# EAGLE board PCB2_SHIELD (EAGLE 9.2.0)
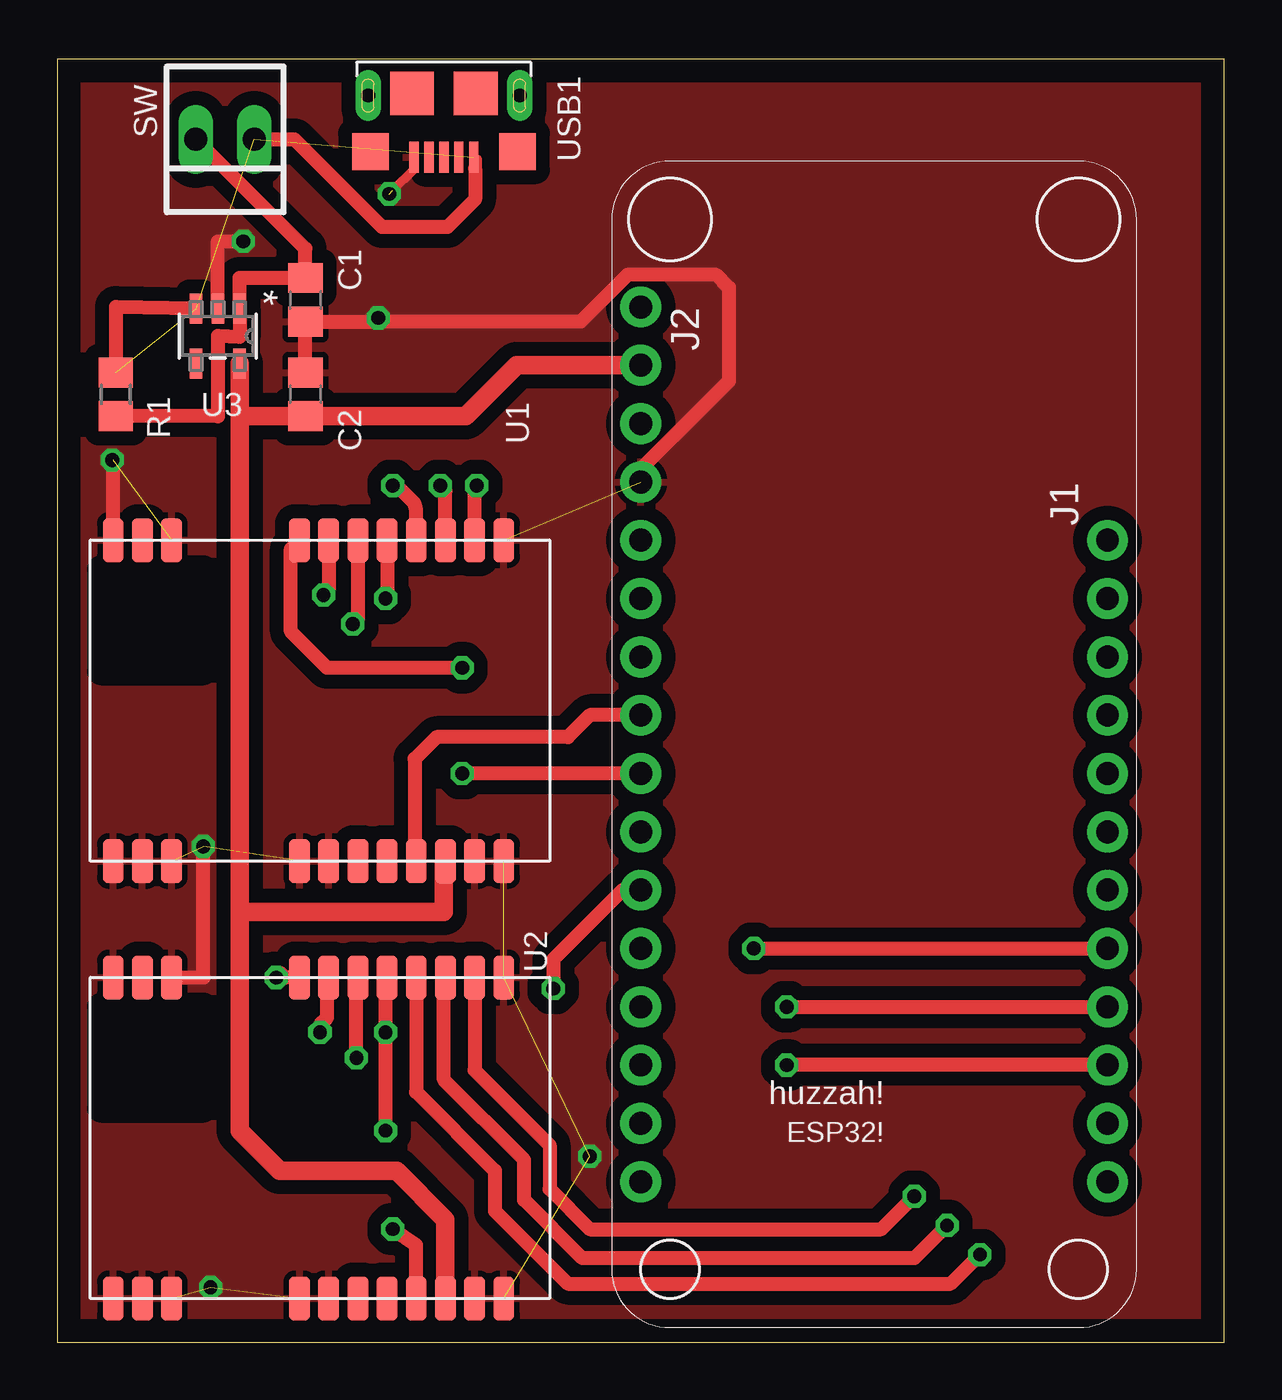
[diagram p0: board, top side]
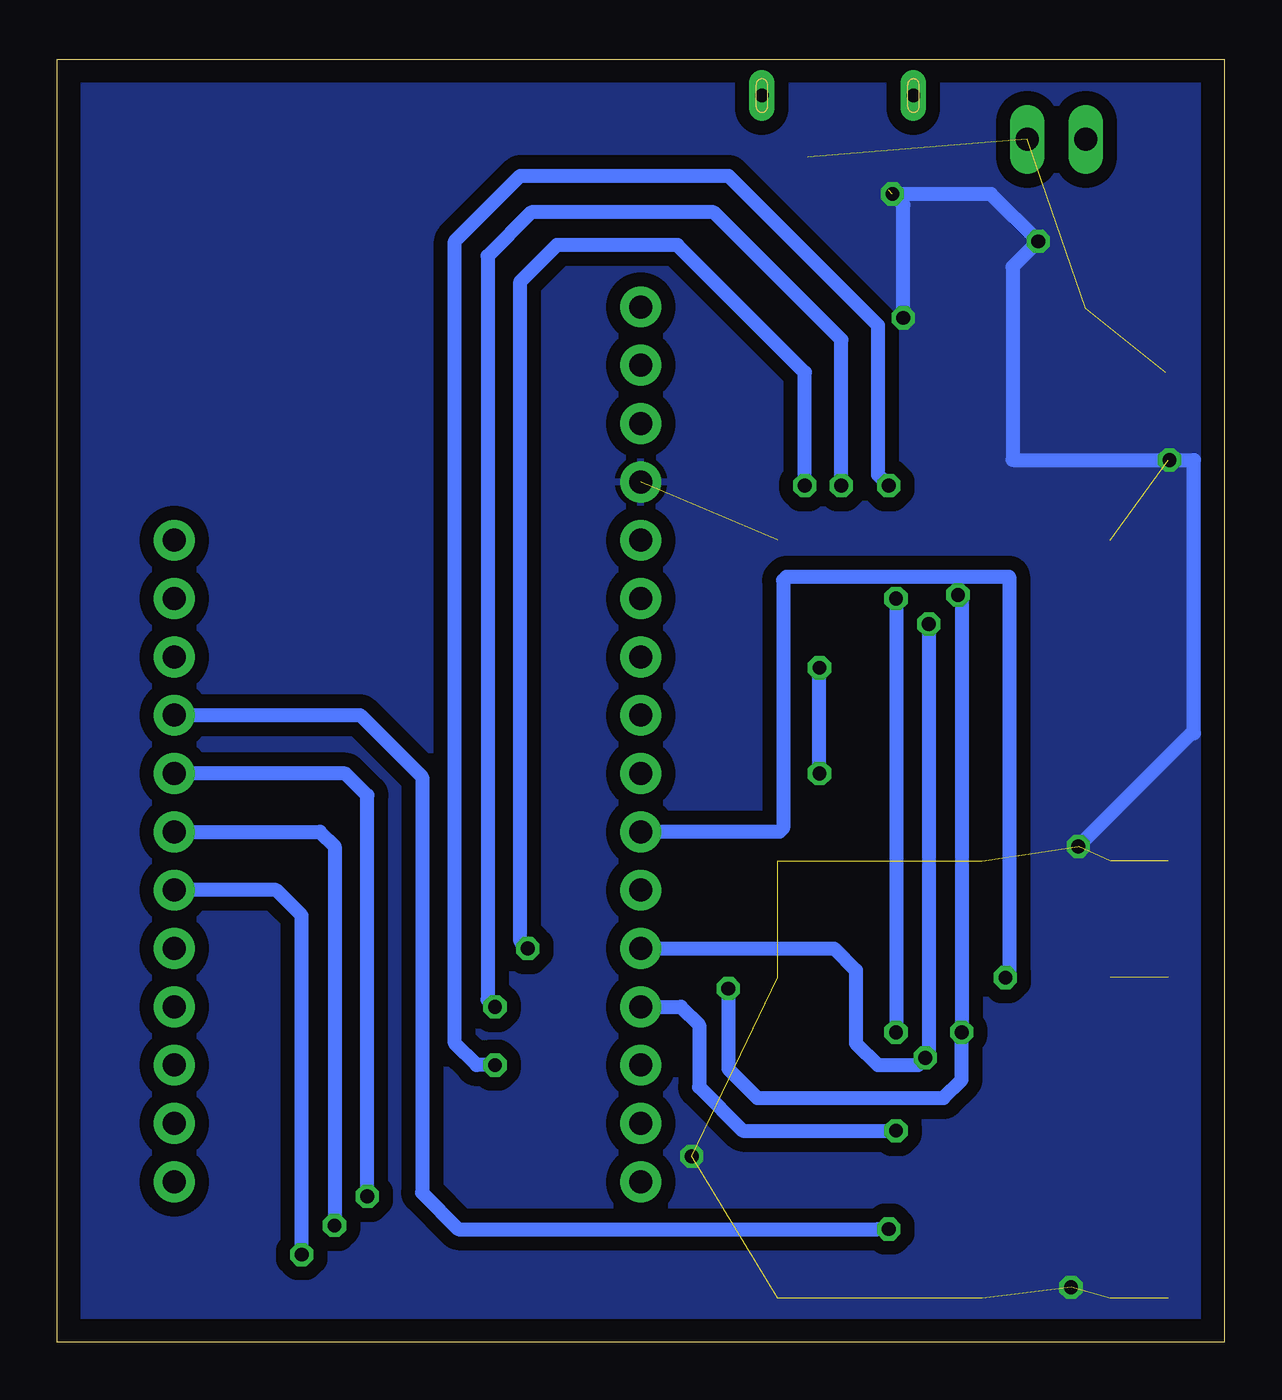
[diagram p1: board, bottom side, seen from below]

Size 50.8 x 55.88 mm. Coordinates in mm from the lower left corner, seen from the top.
Outline: 0,0 50.8,0 50.8,55.88 0,55.88 0,0
Copper layers (1*16): Top 0.035mm / dielectric 1.5mm / Bottom 0.035mm
Design rules "default": minimum track width 10mil, minimum drill 24mil, track to track 8mil, track to pad 8mil, pad to pad 8mil, via to via 8mil, smd to smd 8mil, copper to edge 40mil, drill to drill 8mil, minimum pad ring 10mil, minimum via ring 8mil, stop-mask expansion 4mil, vias tented up to drill 0mil, thermal gap 10mil
Net classes: 0 default: width 0.406 mm, drill 0.584 mm, clearance 0.203 mm

## Footprints (pad centres in the part's own frame; a part is rotated, then mirrored left to right if it is on the bottom)
C0805 = smd 1.3 x 1.5: 1 -0.95,0; 2 0.95,0
FEATHERWING = drill 1 pad 1.778: 1 6.35,1.27; 2 8.89,1.27; 3 11.43,1.27; 4 13.97,1.27; 5 16.51,1.27; 6 19.05,1.27; 7 21.59,1.27; 8 24.13,1.27; 9 26.67,1.27; 10 29.21,1.27; 11 31.75,1.27; 12 34.29,1.27; 13 36.83,1.27; 14 39.37,1.27; 15 41.91,1.27; 16 44.45,1.27; 17 44.45,21.59; 18 41.91,21.59; 19 39.37,21.59; 20 36.83,21.59; 21 34.29,21.59; 22 31.75,21.59; 23 29.21,21.59; 24 26.67,21.59; 25 24.13,21.59; 26 21.59,21.59; 27 19.05,21.59; 28 16.51,21.59
R0805 = smd 1.3 x 1.5: 1 -0.95,0; 2 0.95,0
22-23-2021 = drill 1 long: 1 -1.27,0; 2 1.27,0
E22 = smd 1.905 x 0.9: 1 6.985,-9; 2 6.985,-7.73; 3 6.985,-6.46; 4 6.985,-0.89; 5 6.985,0.38; 6 6.985,1.65; 7 6.985,2.92; 8 6.985,4.19; 9 6.985,5.46; 10 6.985,6.73; 11 6.985,8; 12 -6.985,8; 13 -6.985,6.73; 14 -6.985,5.46; 15 -6.985,4.19; 16 -6.985,2.92; 17 -6.985,1.65; 18 -6.985,0.38; 19 -6.985,-0.89; 20 -6.985,-6.46; 21 -6.985,-7.73; 22 -6.985,-9
SOT25 = smd 1.311 x 0.551: 1 -1.2,0.95; 2 -1.2,0; 3 -1.2,-0.95; 4 1.2,-0.95; 5 1.2,0.95
10118193-0001LF = drill 0.6 pad 1.016 long: 1 -3.3,0; 2 3.3,0 | smd 1.9 x 1.9: BASE@1 -1.385,-0.095; BASE@2 1.385,-0.095 | smd 1.6 x 1.6: BASE@3 -3.2,2.445; BASE@4 3.2,2.445 | smd 0.4 x 1.35: D+ 0,2.68; D- -0.65,2.68; GND 1.3,2.68; ID 0.65,2.68; VBUS -1.3,2.68

## Placement (x,y rotation side)
C1  [C0805]  10.79,45.4 270 top
C2  [C0805]  10.79,41.27 90 top
MS1  FEATHERWING  [FEATHERWING]  24.13,51.44 270 top
R1  [R0805]  2.54,41.27 90 top
SW  22-23-2021  [22-23-2021]  7.3,52.39 180 top
U1  E22-900M22S  [E22]  11.43,27.94 270 top
U2  E22-400M22S  [E22]  11.43,8.89 270 top
U3  AP2112  [SOT25]  6.99,43.81 270 top
USB1  USB  [10118193-0001LF]  16.83,54.29 180 top

## Library data of the parts
C1 C2 R1 = rcl
MS1 = adafruit
SW = con-molex; MF: MOLEX; MPN: 22-23-2021; OC_FARNELL: 1462926; OC_NEWARK: 25C3832
U1 U2 = ebyte
U3 = diodes-inc
USB1 = con-amphenol

## Nets
GND: C1.2 C2.2 MS1.4 U1.1 U1.2 U1.3 U1.4 U1.5 U1.10 U1.11 U1.12 U1.20 U1.22 U2.1 U2.2 U2.3 U2.4 U2.5 U2.10 U2.11 U2.12 U2.20 U2.22 U3.2 USB1.GND
N$1: MS1.9 U1.19
N$2: MS1.11 U1.18 U2.18
N$3: MS1.12 U1.17 U2.17
N$4: MS1.13 U1.16 U2.16
N$5: MS1.19 U1.15
N$6: MS1.20 U1.14
N$7: MS1.21 U1.13
N$8: MS1.8 U1.8
N$9: MS1.25 U2.8
N$10: MS1.24 U2.13
N$11: MS1.23 U2.14
N$12: MS1.22 U2.15
N$14: MS1.10 U2.19
N$15: C1.1 R1.1 SW.2 U3.1
N$17: R1.2 SW.1 U3.3 USB1.VBUS
VCC: C2.1 MS1.2 U1.9 U2.9 U3.5

## Tracks (layer width: path | path; a pad name or v marks a point on that pad's centre or on a via)
GND  (via drill 0.6)  (21 unrouted)
  Top 0.406: USB1.GND 15.53,51.09 14.61,50.16
  Top 0.61: 13.81,44.45 C1.2 C2.2 | 13.81,44.45 v13.97,44.61 | U3.2 6.99,47.94 v8.1,47.94 | U1.22 2.43,38.42 v2.38,38.42 | U2.20 6.35,15.88 v6.35,21.59 | MS1.4 25.4,38.03 29.23,41.86 29.23,45.93 28.68,46.48 24.82,46.48 22.79,44.45 13.81,44.45
  Bottom 0.61: v13.97,44.61 13.97,49.53 v14.45,50.01 10.16,50.01 v8.1,47.94 9.21,46.83 9.21,38.42 v2.38,38.42 1.32,38.42 1.32,26.51 1.43,26.51 v6.35,21.59
  other vias: 6.67,2.38 23.18,8.1
  pour Bottom (isolate 0.61, rank 5): -1.27,57.47 53.02,57.47 53.02,-1.75 -1.27,-1.75
  pour Top (isolate 0.61, rank 5): -4.76,59.69 56.99,59.69 56.99,-4.13 -4.76,-4.13
N$1  (via drill 0.6)
  Top 0.61: MS1.9 v17.62,24.77 | v17.62,29.37 11.75,29.37 10.16,30.96 10.16,34.55 U1.19
  Bottom 0.61: v17.62,24.77 v17.62,29.37
N$2  (via drill 0.6)
  Top 0.61: U1.18 11.81,32.77 v11.59,32.54 | v11.43,13.49 11.43,13.81 11.75,14.13 11.75,15.81 U2.18 | MS1.11 24.61,19.68 21.59,16.67 v21.59,15.4
  Bottom 0.61: v11.59,32.54 11.43,32.38 v11.43,13.49 11.43,11.43 12.22,10.64 20.32,10.64 21.59,11.91 v21.59,15.4
N$3  (via drill 0.6)
  Top 0.61: U1.17 13.08,31.5 v12.86,31.27 | v13.02,12.38 13.02,15.81 U2.17
  Bottom 0.61: v12.86,31.27 12.86,12.54 v13.02,12.38 13.34,12.06 15.08,12.06 16.03,13.02 16.03,16.19 16.99,17.14 MS1.12
N$4  (via drill 0.6)
  Top 0.61: U1.16 14.35,32.45 v14.29,32.38 | U2.16 14.29,15.81 v14.29,13.49 v14.29,9.21
  Bottom 0.61: v14.29,32.38 v14.29,13.49 | MS1.13 23.65,14.61 22.86,13.81 22.86,11.11 20.95,9.21 v14.29,9.21
N$5  (via drill 0.6)
  Top 0.61: MS1.19 v31.75,12.06 | v14.61,37.31 14.76,37.31 15.56,36.51 15.62,36.26 U1.15
  Bottom 0.61: v31.75,12.06 32.54,12.06 33.5,13.02 33.5,47.94 30.64,50.8 21.59,50.8 15.08,44.29 15.08,37.78 v14.61,37.31
N$6  (via drill 0.6)
  Top 0.61: U1.14 16.89,37.09 v16.67,37.31 | v31.75,14.61 MS1.20
  Bottom 0.61: v16.67,37.31 16.67,43.66 22.23,49.21 30.16,49.21 32.07,47.31 32.07,14.92 v31.75,14.61
N$7  (via drill 0.6)
  Top 0.61: U1.13 18.16,37.21 v18.26,37.31 | v30.32,17.14 MS1.21
  Bottom 0.61: v18.26,37.31 18.26,42.23 23.81,47.78 29.05,47.78 30.64,46.2 30.64,17.46 v30.32,17.14
N$8
  Top 0.61: MS1.8 23.18,27.3 22.23,26.35 16.51,26.35 15.56,25.4 15.56,21.02 U1.8
N$9  (via drill 0.6)
  Top 0.61: U2.8 15.62,4.22 v14.61,4.92
  Bottom 0.61: MS1.25 37.62,27.3 34.92,24.61 34.92,6.51 33.34,4.92 15.08,4.92 v14.61,4.92
N$10  (via drill 0.6)
  Top 0.61: U2.13 18.16,11.84 21.43,8.57 21.43,6.67 23.18,4.92 35.88,4.92 v37.31,6.35
  Bottom 0.61: v37.31,6.35 37.31,23.81 38.26,24.77 MS1.24
N$11  (via drill 0.6)
  Top 0.61: v38.73,5.08 37.31,3.65 22.86,3.65 20.32,6.19 20.32,7.94 16.83,11.43 16.83,15.81 U2.14
  Bottom 0.61: MS1.23 39.37,22.23 38.73,21.59 v38.73,5.08
N$12  (via drill 0.6)
  Top 0.61: U2.15 15.62,10.89 19.05,7.46 19.05,5.71 22.23,2.54 38.89,2.54 v40.16,3.81
  Bottom 0.61: v40.16,3.81 40.16,18.57 41.27,19.68 MS1.22
N$14  (via drill 0.6)
  Top 0.61: U2.19 9.9,15.88 9.71,16.07 v9.53,15.88
  Bottom 0.61: v9.53,15.88 9.37,16.03 9.37,33.34 19.05,33.34 19.21,33.18 19.21,22.38 19.37,22.23 MS1.10
N$15
  Top 0.406: 10.96,46.51 C1.1 | 6.1,52.12 SW.2
  Top 0.61: C1.1 | 10.64,46.51 C1.1 | C1.1 10.79,47.62 SW.2 | C1.1 7.94,46.35 U3.1 7.93,43.78 7.94,43.78 6.99,43.81 6.99,40.32 R1.1
N$17  (3 unrouted)
  Top 0.406: USB1.VBUS 18.29,51.51 18.29,51.21 18.19,51.12
  Top 0.61: SW.1 10.32,52.39 14.13,48.58 16.99,48.58 18.19,49.78 18.19,51.12 | U3.3 2.54,45.09 R1.2
VCC
  Top 0.61: U3.5 7.93,40.96 | C2.1
  Top 0.813: C2.1 17.78,40.33 20,42.55 MS1.2 | U1.9 16.83,20.89 16.83,18.73 7.94,18.73 | 7.94,18.73 7.94,19.37 7.94,40.32 | 7.94,40.32 U3.5 | C2.1 7.94,40.32 | 7.94,18.73 7.94,9.21 9.68,7.46 14.76,7.46 16.89,5.33 U2.9